# Altium PCB CutMonitor.PcbDoc
Units mm, origin at the board's own origin, x right, y up, seen from the top; angles counter-clockwise.
Board outline 50 x 50 mm, 4 copper layers (Top Signal Layer, Power Layer, Ground Layer, Bottom Signal Layer), stack 1.989 mm thick; 166 components, 43 nets, 470 pads, 0 vias.
Unrouted connection lines stored in the file: 209.
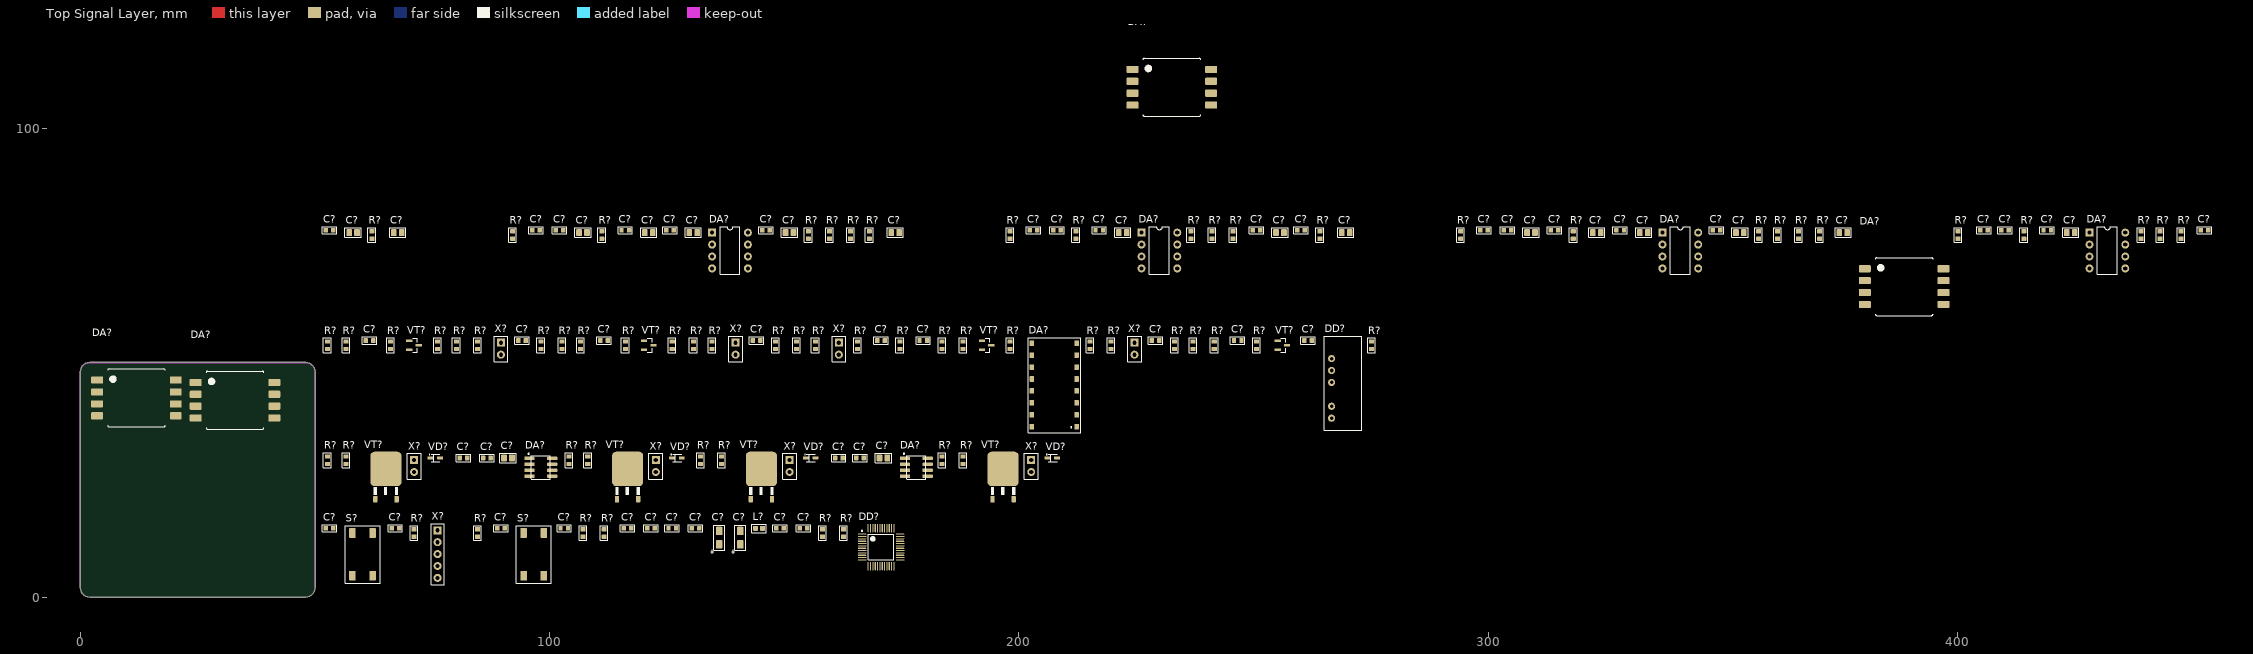
[diagram p0: Top Signal Layer view]
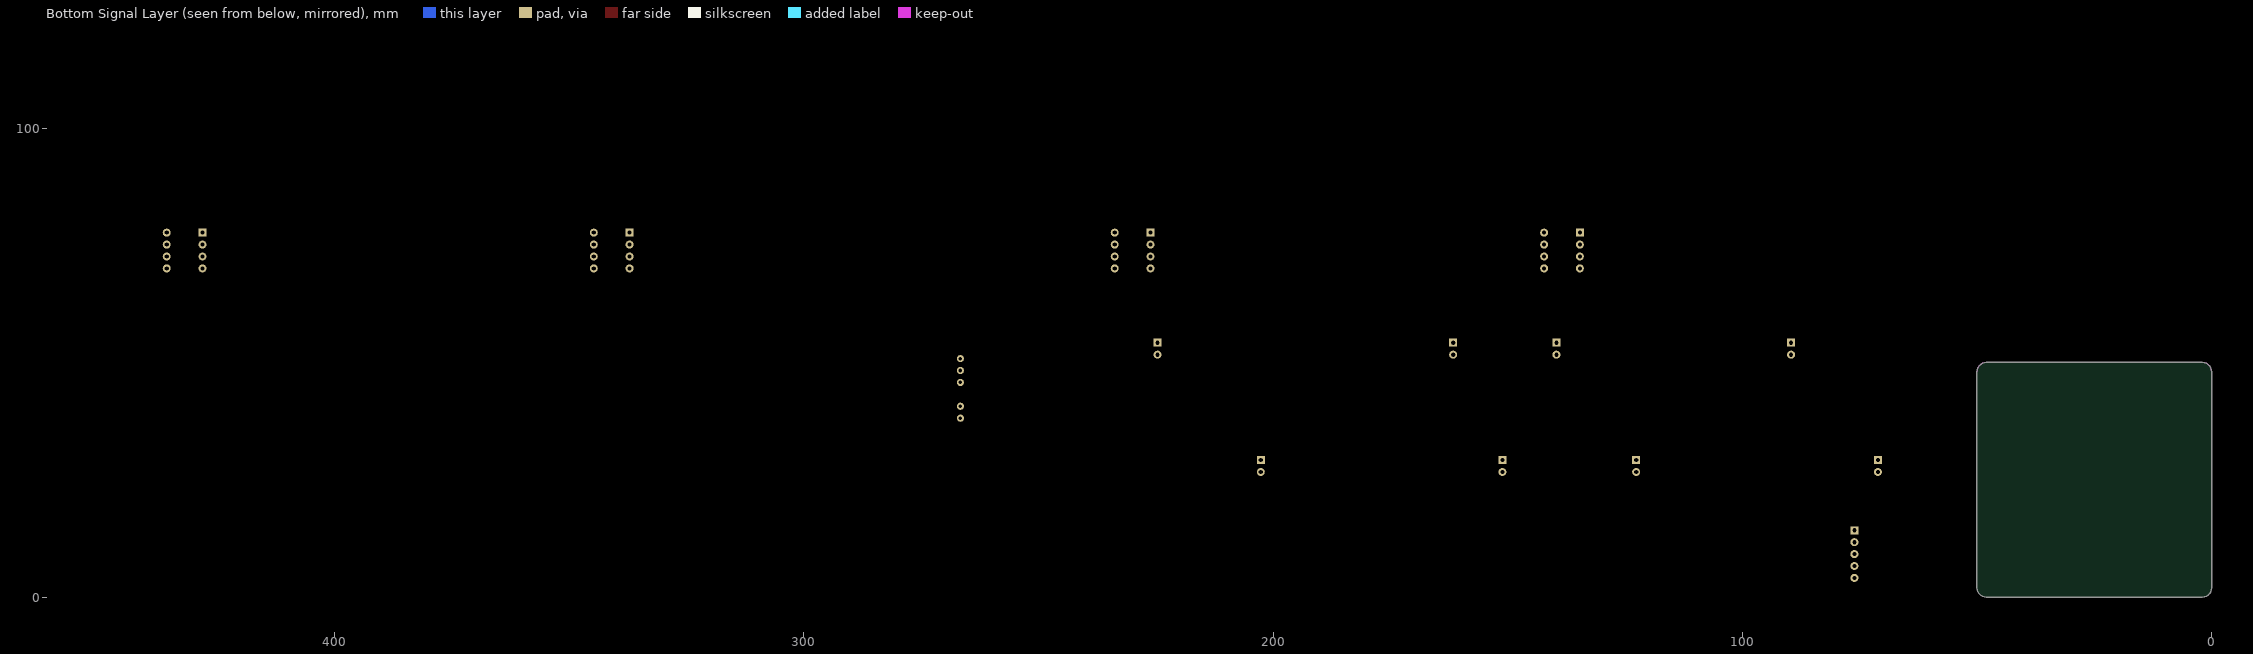
[diagram p1: Bottom Signal Layer view, seen from below]

## Layer stack, top to bottom
Top Solder: solder mask 0.0102, Solder Resist, Dk 3.5
Top Signal Layer: signal copper 0.018
Dielectric 1: core 1.5, Dk 4.2
Power Layer: signal copper 0.036
Dielectric 3: prepreg 0.127, Dk 4.2
Ground Layer: signal copper 0.036
Dielectric 2: core 0.254, Dk 4.2
Bottom Signal Layer: signal copper 0.018
Bottom Solder: solder mask 0.0102, Solder Resist, Dk 3.5

## Board outline
0.486,0.803 0.248,1.182 0.1,1.605 0.05,2.05 0.05,48.05 0.1,48.495 0.248,48.918 0.486,49.297 0.803,49.614 1.182,49.852 1.605,50 2.05,50.05 48.05,50.05 48.495,50 48.918,49.852 49.297,49.614 49.614,49.297 49.852,48.918 50,48.495 50.05,48.05 50.05,2.05 50,1.605 49.852,1.182 49.614,0.803 49.297,0.486 48.918,0.248 48.495,0.1 48.05,0.05 2.05,0.05 1.605,0.1 1.182,0.248 0.803,0.486

## Design rules (kind name [scope] priority, off if disabled: settings)
Clearance Clearance_tracks_inner [OnLayer('Power Layer') OR OnLayer('Ground Layer')] p1: gap=0.35 ignorepadtopadclearanceinfootprint=FALSE except(0: Arc-Hole Track-Hole SMDPad-Hole THPad-Hole Via-Hole Fill-Hole Poly-Hole Region-Hole Text-Hole) // Зазоры между проводниками на внутренних слоях
Clearance Clearance_InputPower [All vs InNet('EGND')] p2: gap=0.3 ignorepadtopadclearanceinfootprint=FALSE
Clearance Clearance_InputChulck [InNet('NetC2_1') vs InNet('NetC2_2')] p3: gap=0.3 ignorepadtopadclearanceinfootprint=FALSE
Clearance Clearance_OutputChulck [InNet('12B') vs InNet('NetC4_2')] p4: gap=0.3 ignorepadtopadclearanceinfootprint=FALSE
Clearance [All] p5: gap=0.2 ignorepadtopadclearanceinfootprint=FALSE
ComponentClearance [All] p1: gap=0.001 collisioncheckmode=3 verticalgap=0 showdistances=FALSE
Height [All] p1: minheight=0 maxheight=100 prefheight=12.7
HoleSize [All] p1: absolutevalues=TRUE maxlimit=10 minlimit=0.2 maxpercent=80.000 minpercent=20.000
MinimumAnnularRing AnnularRing_via [IsVia] p1: minimumring=0.1
MinimumSolderMaskSliver [All] p1: minsoldermaskwidth=0.1
PolygonConnect PolygonConnect_Via [IsVia] p1: connectstyle=Direct reliefconductorwidth=0.254 reliefentries=4 polygonreliefangle="90 Angle" airgapwidth=0.2
PolygonConnect PolygonConnect_EGND [InNet('EGND')] p2: connectstyle=Direct reliefconductorwidth=0.254 reliefentries=4 polygonreliefangle="90 Angle" airgapwidth=0.2
PolygonConnect [All] p3: connectstyle=Relief reliefconductorwidth=0.6 reliefentries=4 polygonreliefangle="90 Angle" airgapwidth=0.2
RoutingVias [All] p1: holewidth=0.711 width=1.27 viastyle="Through Hole" minholewidth=0.711 minwidth=1.27 maxholewidth=0.711 maxwidth=1.27
ShortCircuit ShortCircuit_ANALOG [InNet('3,3В') vs InNet('3,3ВA')] p1: allowed=TRUE
ShortCircuit [All] p2: allowed=FALSE
SilkToSilkClearance [All] p1: silktosilkclearance=0
SilkToSolderMaskClearance [IsPad] p1: minsilkscreentomaskgap=0 clearancetoexposedcopper=TRUE
SolderMaskExpansion [All] p1: expansion=0.025
Width [All] p1: maxlimit=4 minlimit=0.1 preferedwidth=0.2
Width 3,3В [InNet('3,3В')] p2: maxlimit=2 minlimit=0.2 preferedwidth=1
Width 24В [InNet('24В')] p3: maxlimit=4 minlimit=0.2 preferedwidth=4
Width 5В [InNet('5В')] p4: maxlimit=3 minlimit=0.2 preferedwidth=3
23 further rules are at their usual default settings.

## Classes and differential pairs
component class CutMonitor_PressureSensor: C? DA? R?
component class CutMonitor_Opto: C? DA? DD? R? VT? X?
component class CutMonitor_Motor: C? DA? R? VD? VT? X?
component class CutMonitor_MCU: C? DD? L? R? S? VD? X?

## Components (designator, comment, footprint, x,y, rotation, side; value= is the part's Value field where it differs from the comment)
C? "Capacitor" C0603 154.167,14.714 r0 top value=0,1мк
C? "Capacitor" C0603 67.167,14.714 r0 top value=0,1мк
C? "Capacitor_pol" "TANTAL CASE A" 140.667,12.714 r90 top value=10мк
C? "Capacitor_pol" "TANTAL CASE A" 136.167,12.714 r90 top value=10мк
C? "Capacitor" C0603 89.667,14.714 r0 top value=0,1мк
C? "Capacitor" C0603 116.667,14.714 r0 top value=0,1мк
C? "Capacitor" C0603 121.667,14.714 r0 top value=0,1мк
C? "Capacitor" C0603 126.167,14.714 r0 top value=0,1мк
C? "Capacitor" C0603 103.167,14.714 r0 top value=0,1мк
C? "Capacitor" C0603 131.167,14.714 r0 top value=0,1мк
C? "Capacitor" C0603 53.167,14.714 r0 top value=0,1мк
C? "Capacitor" C0603 149.167,14.714 r0 top value=0,1мк
C? "Capacitor" C0603 166.167,29.714 r0 top value=0,1мк
C? "Capacitor" C0603 81.667,29.714 r0 top value=0,1мк
C? "Capacitor" C0805 91.167,29.714 r0 top value=1мк
C? "Capacitor" C0805 171.166,29.714 r0 top value=1мк
C? "Capacitor" C0603 86.667,29.714 r0 top value=0,1мк
C? "Capacitor" C0603 161.667,29.714 r0 top value=0,1мк
C? "Capacitor" C0603 144.167,54.714 r0 top value=0,1мк
C? "Capacitor" C0603 261.666,54.714 r0 top value=0,1мк
C? "Capacitor" C0603 111.667,54.714 r0 top value=0,1мк
C? "Capacitor" C0603 229.166,54.714 r0 top value=0,1мк
C? "Capacitor" C0603 246.666,54.714 r0 top value=0,1мк
C? "Capacitor" C0603 94.167,54.714 r0 top value=0,1мк
C? "Capacitor" C0603 179.666,54.714 r0 top value=0,1мк
C? "Capacitor" C0603 170.666,54.714 r0 top value=0,1мк
C? "Capacitor" C0603 61.667,54.714 r0 top value=0,1мк
C? "Capacitor" C0603 125.667,78.214 r0 top value=0,1мк
C? "Capacitor" C0603 260.166,78.214 r0 top value=10
C? "Capacitor" C0805 58.167,77.714 r0 top value=1мк
C? "Capacitor" C0603 217.166,78.214 r0 top value=0,1мк
C? "Capacitor" C0805 173.666,77.714 r0 top value=1мк
C? "Capacitor" C0805 130.667,77.714 r0 top value=1мк
C? "Capacitor" C0603 203.166,78.214 r0 top value=0,1мк
C? "Capacitor" C0603 53.167,78.214 r0 top value=0,1мк
C? "Capacitor" C0805 222.166,77.714 r0 top value=1мк
C? "Capacitor" C0805 151.167,77.714 r0 top value=1мк
C? "Capacitor" C0603 146.167,78.214 r0 top value=0,1мк
C? "Capacitor" C0805 67.667,77.714 r0 top value=1мк
C? "Capacitor" C0603 116.167,78.214 r0 top value=0,1мк
C? "Capacitor" C0603 102.167,78.214 r0 top value=0,1мк
C? "Capacitor" C0603 97.167,78.214 r0 top value=0,1мк
C? "Capacitor" C0805 121.167,77.714 r0 top value=1мк
C? "Capacitor" C0603 208.166,78.214 r0 top value=10
C? "Capacitor" C0805 107.167,77.714 r0 top value=1мк
C? "Capacitor" C0805 255.666,77.714 r0 top value=1мк
C? "Capacitor" C0603 348.666,78.214 r0 top value=0,1мк
C? "Capacitor" C0603 304.166,78.214 r0 top value=0,1мк
C? "Capacitor" C0805 333.166,77.714 r0 top value=1мк
C? "Capacitor" C0805 353.666,77.714 r0 top value=1мк
C? "Capacitor" C0603 250.666,78.214 r0 top value=0,1мк
C? "Capacitor" C0805 309.166,77.714 r0 top value=1мк
C? "Capacitor" C0603 328.166,78.214 r0 top value=0,1мк
C? "Capacitor" C0603 410.166,78.214 r0 top value=10
C? "Capacitor" C0603 299.166,78.214 r0 top value=0,1мк
C? "Capacitor" C0603 314.166,78.214 r0 top value=0,1мк
C? "Capacitor" C0603 419.166,78.214 r0 top value=0,1мк
C? "Capacitor" C0603 452.666,78.214 r0 top value=10
C? "Capacitor" C0603 405.666,78.214 r0 top value=0,1мк
C? "Capacitor" C0805 323.166,77.714 r0 top value=1мк
C? "Capacitor" C0805 269.666,77.714 r0 top value=1мк
C? "Capacitor" C0805 424.166,77.714 r0 top value=1мк
C? "Capacitor" C0805 375.666,77.714 r0 top value=1мк
DA? "LM5110" SO8 98.167,27.714 r0 top
DA? "LM5110" SO8 178.166,27.714 r0 top
DA? "OPTO-4" OPTO-16 211.666,35.714 r90 top
DA? "OPA137PA" DIP8 428.166,77.714 r0 top
DA? "MPXV5050GP" SOP8 33,42 r0 top
DA? "MPXV5050GP" SOP8 388.666,66.214 r0 top
DA? "OPA137PA" DIP8 226.166,77.714 r0 top
DA? "OPA137PA" DIP8 337.166,77.714 r0 top
DA? "MPXV5050GP" SOP8 232.618,108.69 r0 top
DA? "MPXV5050GP" SOP8 12,42.5 r0 top
DA? "OPA137PA" DIP8 134.667,77.714 r0 top
DD? "STM32F103C8T6TR" LQFP48 170.666,10.714 r0 top
DD? "TMA" TMH0505 266.666,40.714 r90 top
L? "Inductor" L0603 144.667,14.714 r0 top
R? "Resistor_0,062Вт" R0603 84.667,13.714 r90 top value=10к
R? "Resistor_0,062Вт" R0603 71.167,13.714 r90 top value=100
R? "Resistor_0,062Вт" R0603 111.667,13.714 r90 top value=10к
R? "Resistor_0,062Вт" R0603 107.167,13.714 r90 top value=100
R? "Resistor_0,062Вт" R0603 162.667,13.714 r90 top value=10к
R? "Resistor_0,062Вт" R0603 158.167,13.714 r90 top value=10к
R? "Resistor_0,062Вт" R0603 183.666,29.214 r90 top value=10к
R? "Resistor_0,062Вт" R0603 188.166,29.214 r90 top value=100
R? "Resistor_0,062Вт" R0603 52.667,29.214 r90 top value=10к
R? "Resistor_0,062Вт" R0603 56.667,29.214 r90 top value=100
R? "Resistor_0,062Вт" R0603 132.167,29.214 r90 top value=10к
R? "Resistor_0,062Вт" R0603 136.667,29.214 r90 top value=100
R? "Resistor_0,062Вт" R0603 104.167,29.214 r90 top value=10к
R? "Resistor_0,062Вт" R0603 108.167,29.214 r90 top value=100
R? "Resistor_0,062Вт" R0603 66.167,53.714 r90 top value=100
R? "Resistor_0,062Вт" R0603 116.167,53.714 r90 top value=100
R? "Resistor_0,062Вт" R0603 188.166,53.714 r90 top value=100
R? "Resistor_0,062Вт" R0603 250.666,53.714 r90 top value=100
R? "Resistor_0,062Вт" R0603 76.167,53.714 r90 top value=10к
R? "Resistor_0,062Вт" R0603 52.667,53.714 r90 top value=1к
R? "Resistor_0,062Вт" R0603 56.667,53.714 r90 top value=1к
R? "Resistor_0,062Вт" R0603 134.667,53.714 r90 top value=10к
R? "Resistor_0,062Вт" R0603 98.167,53.714 r90 top value=1к
R? "Resistor_0,062Вт" R0603 102.667,53.714 r90 top value=1к
R? "Resistor_0,062Вт" R0603 219.666,53.714 r90 top value=10к
R? "Resistor_0,062Вт" R0603 165.667,53.714 r90 top value=1к
R? "Resistor_0,062Вт" R0603 174.666,53.714 r90 top value=1к
R? "Resistor_0,062Вт" R0603 275.166,53.714 r90 top value=10к
R? "Resistor_0,062Вт" R0603 237.166,53.714 r90 top value=1к
R? "Resistor_0,062Вт" R0603 241.666,53.714 r90 top value=1к
R? "Resistor_0,062Вт" R0603 80.167,53.714 r90 top value=100
R? "Resistor_0,062Вт" R0603 84.667,53.714 r90 top value=150
R? "Resistor_0,062Вт" R0603 126.167,53.714 r90 top value=100
R? "Resistor_0,062Вт" R0603 130.667,53.714 r90 top value=150
R? "Resistor_0,062Вт" R0603 152.667,53.714 r90 top value=100
R? "Resistor_0,062Вт" R0603 156.667,53.714 r90 top value=150
R? "Resistor_0,062Вт" R0603 198.166,53.714 r90 top value=100
R? "Resistor_0,062Вт" R0603 215.166,53.714 r90 top value=150
R? "Resistor_0,062Вт" R0603 106.667,53.714 r90 top value=150
R? "Resistor_0,062Вт" R0603 148.167,53.714 r90 top value=150
R? "Resistor_0,062Вт" R0603 183.666,53.714 r90 top value=150
R? "Resistor_0,062Вт" R0603 233.166,53.714 r90 top value=150
R? "Resistor_0,062Вт" R0603 236.666,77.214 r90 top value=1к
R? "Resistor_0,062Вт" R0603 241.166,77.214 r90 top value=1к
R? "Resistor_0,062Вт" R0603 212.166,77.214 r90 top value=1к
R? "Resistor_0,062Вт" R0603 168.166,77.214 r90 top value=1к
R? "Resistor_0,062Вт" R0603 370.666,77.214 r90 top value=1к
R? "Resistor_0,062Вт" R0603 294.166,77.214 r90 top value=1м
R? "Resistor_0,062Вт" R0603 357.666,77.214 r90 top value=1к
R? "Resistor_0,062Вт" R0603 443.166,77.214 r90 top value=1к
R? "Resistor_0,062Вт" R0603 447.666,77.214 r90 top value=1к
R? "Resistor_0,062Вт" R0603 264.166,77.214 r90 top value=1к
R? "Resistor_0,062Вт" R0603 366.166,77.214 r90 top value=1к
R? "Resistor_0,062Вт" R0603 361.666,77.214 r90 top value=1к
R? "Resistor_0,062Вт" R0603 318.166,77.214 r90 top value=1к
R? "Resistor_0,062Вт" R0603 400.166,77.214 r90 top value=1м
R? "Resistor_0,062Вт" R0603 439.166,77.214 r90 top value=1к
R? "Resistor_0,062Вт" R0603 414.166,77.214 r90 top value=1к
R? "Resistor_0,062Вт" R0603 92.167,77.214 r90 top value=1м
R? "Resistor_0,062Вт" R0603 164.167,77.214 r90 top value=1к
R? "Resistor_0,062Вт" R0603 155.167,77.214 r90 top value=1к
R? "Resistor_0,062Вт" R0603 159.667,77.214 r90 top value=1к
R? "Resistor_0,062Вт" R0603 111.167,77.214 r90 top value=1к
R? "Resistor_0,062Вт" R0603 62.167,77.214 r90 top value=1к
R? "Resistor_0,062Вт" R0603 198.166,77.214 r90 top value=1м
R? "Resistor_0,062Вт" R0603 245.666,77.214 r90 top value=1к
S? "Button" Button_SMD 60.167,9.214 r90 top
S? "Button" Button_SMD 96.667,9.214 r90 top
VD? "DiodeSchottky" SOD-323 207.166,29.714 r0 top
VD? "DiodeSchottky" SOD-323 75.667,29.714 r0 top
VD? "DiodeSchottky" SOD-323 155.667,29.714 r0 top
VD? "DiodeSchottky" SOD-323 127.167,29.714 r0 top
VT? "N-MOSFET" DPAK 196.666,27.214 r0 top
VT? "N-MOSFET" DPAK 65.167,27.214 r0 top
VT? "N-MOSFET" DPAK 145.167,27.214 r0 top
VT? "N-MOSFET" DPAK 116.667,27.214 r0 top
VT? "P-MOSFET" SOT23-3 71.167,53.714 r0 top
VT? "P-MOSFET" SOT23-3 121.167,53.714 r0 top
VT? "P-MOSFET" SOT23-3 193.166,53.714 r0 top
VT? "P-MOSFET" SOT23-3 256.166,53.714 r0 top
X? "SWD Программатор" PLS-5 76.167,9.214 r0 top
X? "=Name" JUMPER_2.54 202.666,26.714 r0 top
X? "=Name" JUMPER_2.54 71.167,26.714 r0 top
X? "=Name" JUMPER_2.54 151.167,26.714 r0 top
X? "=Name" JUMPER_2.54 122.667,26.714 r0 top
X? "=Name" JUMPER_2.54 89.667,51.714 r0 top
X? "=Name" JUMPER_2.54 139.667,51.714 r0 top
X? "=Name" JUMPER_2.54 161.667,51.714 r0 top
X? "=Name" JUMPER_2.54 224.666,51.714 r0 top

## Footprints (in the part's own frame and the unit in brackets; to place one, negate y for a bottom-side part, rotate by r counter-clockwise, add the part's x,y. Pads: shape width x height; smd on the part's side, far side on the other; paste and mask are expansions set on the pad)
Button_SMD [mm] "Кнопка"
  rrect25% 2.1x1.4 smd: 1(-4.6,2.15) 2(4.5,2.15) 3(-4.6,-2.15) 4(4.5,-2.15)
  silkscreen extent -6.22,-3.75 6,3.7, body extent -4.5,-3 4.5,3, height 7
C0603 [mm]
  rrect25% 0.94x1.03 smd: 1(-0.8,0) 2(0.8,0)
  silkscreen extent -1.55,-0.77 1.53,0.77, body extent -0.8,-0.4 0.8,0.4, height 0.9
C0805 [mm]
  rrect25% 1.21x1.46 smd paste-5: 1(-0.845,0) 2(0.845,0)
  silkscreen extent -1.73,-1 1.73,1, body extent -1,-0.62 1,0.63, height 0.78
DIP8 [mm]
  rect 1.7x1.7 hole 0.9: 1(0,0)
  round 1.7 hole 0.9: 2(0,-2.54) 3(0,-5.08) 4(0,-7.62) 5(7.62,-7.62) 6(7.62,-5.08) 7(7.62,-2.54) 8(7.62,0)
  silkscreen extent 1.68,-8.89 5.94,1.27, body extent -0.12,-8.51 7.75,0.89, height 4.36
DPAK [mil]
  rrect25% 37x52 smd: 1(-89,-248) 3(89,-248)
  rrect25% 260x288 smd: 2(0,6)
  silkscreen extent -102,-213 102,-146, body extent -193,-266 128,108, height 91
JUMPER_2.54 [mm] "Разъем для программатора ISP"
  rect 1.7x1.7 hole 0.9: 1(0,2.54)
  round 1.7 hole 0.9: 2(0,0)
  silkscreen extent -1.45,-1.54 1.5,3.95, body extent -1.26,-1.35 1.28,3.79, height 8.54
L0603 [mm]
  rrect25% 1.05x1.07 smd paste-5: 1(-0.76,0) 2(0.76,0)
  silkscreen extent -1.53,-0.9 1.53,0.9, body extent -0.8,-0.4 0.8,0.4, height 0.8
LQFP48 [mm] "Thin QFP, 48-Leads, Body 7x7mm, Pitch 0.5mm, IPC Medium Density"
  oval 1.8x0.25 smd: 1(-4.05,2.75) 2(-4.05,2.25) 3(-4.05,1.75) 4(-4.05,1.25) 5(-4.05,0.75) 6(-4.05,0.25) 7(-4.05,-0.25) 8(-4.05,-0.75) 9(-4.05,-1.25) 10(-4.05,-1.75) 11(-4.05,-2.25) 12(-4.05,-2.75) 25(4.05,-2.75) 26(4.05,-2.25) 27(4.05,-1.75) 28(4.05,-1.25) 29(4.05,-0.75) 30(4.05,-0.25) 31(4.05,0.25) 32(4.05,0.75) 33(4.05,1.25) 34(4.05,1.75) 35(4.05,2.25) 36(4.05,2.75)
  oval 0.25x1.8 smd: 13(-2.75,-4.05) 14(-2.25,-4.05) 15(-1.75,-4.05) 16(-1.25,-4.05) 17(-0.75,-4.05) 18(-0.25,-4.05) 19(0.25,-4.05) 20(0.75,-4.05) 21(1.25,-4.05) 22(1.75,-4.05) 23(2.25,-4.05) 24(2.75,-4.05) 37(2.75,4.05) 38(2.25,4.05) 39(1.75,4.05) 40(1.25,4.05) 41(0.75,4.05) 42(0.25,4.05) 43(-0.25,4.05) 44(-0.75,4.05) 45(-1.25,4.05) 46(-1.75,4.05) 47(-2.25,4.05) 48(-2.75,4.05)
  silkscreen extent -4.17,-2.75 2.75,3.57, body extent -4.51,-4.51 4.51,4.51, height 1.46
OPTO-16 [mm]
  rrect25% 1.2x0.96 smd: 1(0.651,-0.658) 2(3.191,-0.658) 3(5.731,-0.658) 4(8.271,-0.658) 5(10.811,-0.658) 6(13.351,-0.658) 7(15.891,-0.658) 8(18.431,-0.658) 9(18.431,8.862) 10(15.891,8.862) 11(13.351,8.862) 12(10.811,8.862) 13(8.271,8.862) 14(5.731,8.862) 15(3.191,8.862) 16(0.651,8.862)
  silkscreen extent -0.65,-1.5 19.63,9.67, body extent -0.36,-0.91 19.46,9.09, height 3.85
PLS-5 [mm]
  rect 1.7x1.7 hole 0.9: 1(0,5.08)
  round 1.7 hole 0.9: 2(0,2.54) 3(0,0)
  round 1.7 hole 0.9 mask+0.102: 4(0,-2.54) 5(0,-5.08)
  silkscreen extent -1.4,-6.48 1.4,6.46, body extent -1.27,-6.35 1.27,6.35, height 8.54
R0603 [mm]
  rrect25% 0.92x1.08 smd: 1(-0.8,0) 2(0.8,0)
  silkscreen extent -1.55,-0.8 1.55,0.82, body extent -0.8,-0.4 0.8,0.4, height 0.5
SO8 [mm]
  rrect25% 2.17x0.68 smd: 1(-2.43,1.905) 2(-2.43,0.635) 3(-2.43,-0.635) 4(-2.43,-1.905) 5(2.43,-1.905) 6(2.43,-0.635) 7(2.43,0.635) 8(2.43,1.905)
  silkscreen extent -2.74,-2.5 2,3.02, body extent -3,-2.54 3,2.54, height 1.7
SOD-323 [mm]
  rrect25% 1.26x0.58 smd: 1(-1.03,0) 2(1.03,0)
  silkscreen extent -1.26,-0.82 1,0.82, body extent -1.3,-0.67 1.3,0.68, height 1.1
SOP8 [mil]
  rrect25% 100x60 smd: 1(-330,150) 2(-330,50) 3(-330,-50) 4(-330,-150) 5(330,-150) 6(330,-50) 7(330,50) 8(330,150)
  silkscreen extent -242,-242 242,242, body extent -358,-237 358,488, height 308
SOT23-3 [mm]
  rrect25% 1.35x0.61 smd: 1(-1,0.95) 2(1,0) 3(-1,-0.95)
  silkscreen extent -0.3,-1.52 0.7,1.52, body extent -1.15,-1.5 1.15,1.5, height 1.1
"TANTAL CASE A" [mm]
  rrect25% 1.81x1.36 smd: 1(-1.425,0) 2(1.425,0)
  silkscreen extent -3.37,-1.2 2.7,1.82, body extent -1.7,-0.9 1.7,0.9, height 1.8
TMH0505 [mil]
  round 60 hole 30: 1(-100,0) 2(0,0) 4(200,0) 6(400,0) ""(300,0)
  silkscreen extent -201,-254 587,63, body extent -190,-245 578,54, height 404

## Part data
C? C? C? C? C? C? C? C? C? C? C? C? C? C? C? C? C? C? C? C? C? C? C? C? C? C? C? C? C? C? C? C? C? C? C? C? C? C? C?: library part cap131, "Конденсатор", Manufacture=Murata, Part Name=Ceramic, Part Number=GRM188R71H104KA93D, Voltage=50B, id=cap131, TKE=X7R
C? C?: library part cap199, "Конденсатор полярный", Manufacture=Vishay, Part Name=Tantal, Part Number=293D106X9016A2TE3, Voltage=16В, id=cap199
C? C? C? C? C? C? C? C? C? C? C? C? C? C? C? C? C? C?: library part cap151, "Конденсатор", Manufacture=Murata, Part Name=Ceramic, Part Number=GRM21BR71H105K, Voltage=50B, id=cap151, TKE=X7R
C? C? C? C?: library part cap71, "Конденсатор", Manufacture=Murata, Part Name=Ceramic, Part Number=GRM1885C1H100J, Voltage=50B, id=cap71, TKE=NP0
DA? DA?: library part driver15, "Driver 5A 2-OUT Low Side Inv/Non-Inv", Manufacture="Texas Instruments", Maximum output current=5A, Max Operating Supply Voltage=15B, Min Operating Supply Voltage=(-)0,3B, Operating Supply Voltage=3,5-14B, Part Name="Dual 5-A Compound Gate Driver", Part Number=LM5110-1M, id=driver15, Logic High=2,2В, Logic Low=0,8B, “A” OUTPUT=Noninverting, “B” OUTPUT=Noninverting
DA?: library part KB847-B, "Опторазвязка х4", Cut-off frequency=80kHz, Forward Voltage=1,2B, Manufacturer=Kingbright, id=opto1, Part Number=KB847-B
DA? DA? DA? DA?: library part amp11, "FET-INPUT OPERATIONAL AMPLIFIERS", Input Bias Current=100pA, Manufacture="Texas Instruments", Offset voltage=2,5mB, Part Name="FET-INPUT Amplifier", Supply Voltage=4,5-36B, Bandwidth=1МГц, Channels=1, CMRR=76-84dB, id=amp11, Part Number=OPA137PA, PSRR=80,92dB, Rail-to-rail=yes
DA? DA? DA? DA?: "Integrated Silicon Pressure Sensor", Manufacture="Freescale Semiconductor", id=sensor4, Interface=ANALOG, Part Name="Integrated Silicon Pressure Sensor", Part Number=MPXV5050GP, Type sensor=Pressure
DD?: library part microcont0, "Medium-density performance line ARM®-based 32-bit MCU with 64  or 128 KB Flash, USB, CAN, 7 timers, 2 ADCs, 9 com. interfaces", Frequency=72MHz, Part Name=Microcontroller, Power Supply="2.0-3.6 V", ADC=10x12b, Flash=64kb, id=microcont0, Interface="can, i2c, irda, lin, spi, uart, usb", Part Number=STM32F103C8T6TR, Pin in=37
DD?: library part pwr22, "DC/DC преобразователь", Current=200mA, Input Voltage=5B, Manufacturer="Traco Power", Part Name="DC/DC Converter Isolated", Part Number="TMA 0505S", id=pwr22, Output Voltage=5B, Type=Isolated
L?: library part ind0, "EMI Suppression Filter", Part Name="EMI Suppression Filters", Part Number=BLM18PG181SN1D, Rated Current=1,5A, Resistance=0,09Ohm, id=ind0
R? R? R? R? R? R? R? R? R? R? R? R?: library part res483, "Резистор", Manufacture=Yageo, Part Name=Resistor, Part Number=RC0603FR-0710KL, Power=0,062Вт, Accuracy=0,01, id=res483
R? R? R? R? R? R? R? R? R? R? R? R? R? R?: library part res435, "Резистор", Manufacture=Yageo, Part Name=Resistor, Part Number=RC0603FR-07100RL, Power=0,062Вт, Accuracy=0,01, id=res435
R? R? R? R? R? R? R? R? R? R? R? R? R? R? R? R? R? R? R? R? R? R? R? R? R? R? R? R?: library part res459, "Резистор", Manufacture=Yageo, Part Name=Resistor, Part Number=RC0603FR-071KL, Power=0,062Вт, Accuracy=0,01, id=res459
R? R? R? R? R? R? R? R?: library part res439, "Резистор", Manufacture=Yageo, Part Name=Resistor, Part Number=RC0603FR-07150RL, Power=0,062Вт, Accuracy=0,01, id=res439
R? R? R? R?: library part res531, "Резистор", Manufacture=Yageo, Part Name=Resistor, Part Number=RC0603FR-071ML, Power=0,062Вт, Accuracy=0,01, id=res531
S? S?: library part btn4, "Кнопка", Part Name="Button 5mm", id=btn4
VD? VD? VD? VD?: library part diode19, "Диод Шоттки", Capacitance=50pF, Forward Current=10mA, Forward Voltage=0,64B, Manufacture="NXP Semiconductor", Max Reverse Voltage=40B, Part Name="Diode Schottky", Part Number=PMEG4010BEA.115, id=diode19, Number of Channels=1
VT? VT? VT? VT?: library part trans9, Continuous drain current=60A, Gate-to-source voltage=(+-)16B, Manufacturer="International Rectifier", Part Number=IRLR2905ZPBF, Power dissipation=110W, Pulsed drain current=240A, id=trans9, Rds=0,0135Ohm, Structure=n-channel, V drain-source max=55B
VT? VT? VT? VT?: library part trans5, "N-MOSFET", Continuous drain current=(-4,3)A, Gate-to-source voltage=(+-)12B, Manufacturer="International Rectifier", Part Number=IRLML2244TRPbF, Power dissipation=1,3W, Pulsed drain current=(-18)A, id=trans5, Rds=0,054Ohm, Structure=p-channel, V drain-source max=(-20B)
X?: library part connect6, "Разъем - 5 конт. вилка", Manufacture="Ningbo connfly electronic", Part Name=PLS-5, Part Number=DS1021-1*5SF112-B, Contact_1=+3,3B, Contact_2=SWCLK, Contact_3=GND, Contact_4=SWDIO, Contact_5=RESET, Etch=2,54mm, id=connect6
X? X? X? X? X? X? X? X?: library part connect54, "Разъем - 2 конт. вилка", Part Name="Jumper 2,54mm", Etch=2,54mm, id=connect54
  X?: Contact_1=MOTOR1_P, Contact_2=MOTOR1_N
  X?: Contact_1=MOTOR4_P, Contact_2=MOTOR4_N
  X?: Contact_1=MOTOR2_P, Contact_2=MOTOR2_N
  X?: Contact_1=MOTOR3_P, Contact_2=MOTOR3_N
  X?: Contact_1=NET_IN4, Contact_2=NET_OUT4
  X?: Contact_1=NET_IN3, Contact_2=NET_OUT3
  X?: Contact_1=NET_IN2, Contact_2=NET_OUT2
  X?: Contact_1=NET_IN1, Contact_2=NET_OUT1

## Nets (pads, with @x,y where several pads share a name; then routed paths per layer and width w, separated by ;. In a path a pad name is that pad's centre, name@x,y a point inside that pad or via, vN(x,y) a via of type N, cw(c..) or ccw(c..) an arc to the next point about the centre after c; other vN are vias at no path point)
3,3B: C?.1@136.167,11.289 C?.2@53.967,14.714 C?.2@90.467,14.714 C?.2@117.467,14.714 C?.2@122.467,14.714 C?.2@126.967,14.714 C?.2@154.967,14.714 DD?.5 DD?.24 DD?.36 DD?.48 L?.1 R?.1@162.667,12.914 R?.2@84.667,14.514 R?.2@111.667,14.514
3,3В: DA?.10 DA?.12 DA?.14 DA?.16 R?.2@76.167,54.514 R?.2@134.667,54.514 R?.2@219.666,54.514 R?.2@275.166,54.514 VT?.3@70.167,52.764 VT?.3@120.167,52.764 VT?.3@192.166,52.764 VT?.3@255.166,52.764
5BA: C?.2@53.967,78.214 C?.2@59.012,77.714 C?.2@102.967,78.214 C?.2@108.012,77.714 C?.2@126.467,78.214 C?.2@131.512,77.714 C?.2@146.967,78.214 C?.2@152.012,77.714 C?.2@251.466,78.214 C?.2@256.511,77.714 C?.2@304.966,78.214 C?.2@310.011,77.714 C?.2@314.966,78.214 C?.2@324.011,77.714 C?.2@349.466,78.214 C?.2@354.511,77.714 DA?.2@3.618,43.77 DA?.2@24.618,43.27 DA?.2@224.236,109.96 DA?.2@380.284,67.484 DA?.7@142.287,75.174 DA?.7@233.786,75.174 DA?.7@344.786,75.174 DA?.7@435.786,75.174 R?.2@159.667,78.014 R?.2@241.166,78.014 R?.2@366.166,78.014 R?.2@443.166,78.014
5В: C?.2@82.467,29.714 C?.2@87.467,29.714 C?.2@92.012,29.714 C?.2@162.467,29.714 C?.2@166.967,29.714 C?.2@172.011,29.714 DA?.6@100.597,27.079 DA?.6@180.596,27.079 DA?.8@100.597,29.619 DA?.8@180.596,29.619 DD?.1@266.666,38.174
12B: VD?.1@74.637,29.714 VD?.1@126.137,29.714 VD?.1@154.637,29.714 X?.1@71.167,29.254 X?.1@122.667,29.254 X?.1@151.167,29.254 X?.1@202.666,29.254
AGND: C?.1@52.367,78.214 C?.1@57.322,77.714 C?.1@101.367,78.214 C?.1@106.322,77.714 C?.1@124.867,78.214 C?.1@129.822,77.714 C?.1@145.367,78.214 C?.1@150.322,77.714 C?.1@249.866,78.214 C?.1@254.821,77.714 C?.1@303.366,78.214 C?.1@308.321,77.714 C?.1@313.366,78.214 C?.1@322.321,77.714 C?.1@347.866,78.214 C?.1@352.821,77.714 C?.2@97.967,78.214 C?.2@116.967,78.214 C?.2@203.966,78.214 C?.2@217.966,78.214 C?.2@299.966,78.214 C?.2@328.966,78.214 C?.2@406.466,78.214 C?.2@419.966,78.214 DA?.3@3.618,41.23 DA?.3@24.618,40.73 DA?.3@224.236,107.42 DA?.3@380.284,64.944 DA?.4@134.667,70.094 DA?.4@226.166,70.094 DA?.4@337.166,70.094 DA?.4@428.166,70.094 R?.1@155.167,76.414 R?.1@236.666,76.414 R?.1@361.666,76.414 R?.1@439.166,76.414
DGND: C?.1@52.367,14.714 C?.1@60.867,54.714 C?.1@66.367,14.714 C?.1@88.867,14.714 C?.1@102.367,14.714 C?.1@110.867,54.714 C?.1@115.867,14.714 C?.1@120.867,14.714 C?.1@125.367,14.714 C?.1@130.367,14.714 C?.1@148.367,14.714 C?.1@153.367,14.714 C?.1@178.866,54.714 C?.1@245.866,54.714 C?.2@136.167,14.139 C?.2@140.667,14.139 DD?.2@166.616,12.964 DD?.8 DD?.23 DD?.35 DD?.47 R?.1@52.667,52.914 R?.1@56.667,52.914 R?.1@98.167,52.914 R?.1@102.667,52.914 R?.1@158.167,12.914 R?.1@165.667,52.914 R?.1@174.666,52.914 R?.1@237.166,52.914 R?.1@241.666,52.914 S?.4 X?.3
EGND: C?.1@260.866,54.714 DD?.4@266.666,45.794 R?.1@80.167,52.914 R?.1@126.167,52.914 R?.1@152.667,52.914 R?.1@198.166,52.914
GND: C?.1@80.867,29.714 C?.1@85.867,29.714 C?.1@90.322,29.714 C?.1@160.867,29.714 C?.1@165.366,29.714 C?.1@170.321,29.714 DA?.1@95.737,29.619 DA?.1@175.736,29.619 DA?.3@95.737,27.079 DA?.3@175.736,27.079 R?.1@52.667,28.414 R?.1@104.167,28.414 R?.1@132.167,28.414 R?.1@183.666,28.414 VT?.3@67.427,20.914 VT?.3@118.927,20.914 VT?.3@147.427,20.914 VT?.3@198.927,20.914
MCU_BTN_1: DD?.18 R?.2@107.167,14.514
MCU_BTN_2: DD?.19 R?.2@71.167,14.514
MCU_OPTO_OUT1: DD?.41 R?.2@237.166,54.514 VT?.2@257.166,53.714
MCU_OPTO_OUT2: DD?.42 R?.2@165.667,54.514 VT?.2@194.166,53.714
MCU_OPTO_OUT3: DD?.43 R?.2@98.167,54.514 VT?.2@122.167,53.714
MCU_OPTO_OUT4: DD?.45 R?.2@52.667,54.514 VT?.2@72.167,53.714
MCU_RESET: C?.2@149.967,14.714 DD?.1@166.616,13.464 DD?.7 R?.2@162.667,14.514
MCU_SENSOR_1: C?.2@453.466,78.214 DA?.6@435.786,72.634 DD?.21 R?.1@447.666,76.414
MCU_SENSOR_2: C?.2@260.966,78.214 DA?.6@233.786,72.634 DD?.22 R?.1@245.666,76.414
MCU_SENSOR_3: C?.2@410.966,78.214 DA?.6@344.786,72.634 DD?.25 R?.1@370.666,76.414
MCU_SENSOR_4: C?.2@208.966,78.214 DA?.6@142.287,72.634 DD?.26 R?.1@164.167,76.414
MCU_SWCLK: DD?.6@166.616,10.964 DD?.37
MCU_SWDIO: DD?.34
MOTOR_OUT1: DA?.2@175.736,28.349 DD?.11
MOTOR_OUT2: DA?.4@175.736,25.809 DD?.12
MOTOR_OUT3: DA?.2@95.737,28.349 DD?.13
MOTOR_OUT4: DA?.4@95.737,25.809 DD?.14
NetC?_1: C?.1@140.667,11.289 C?.2@131.967,14.714 DD?.9 L?.2
NetC?_2: C?.2@67.967,14.714 R?.1@71.167,12.914 R?.1@84.667,12.914 S?.1@58.017,4.614
NetDA?_4: DA?.4@3.618,38.69 R?.2@62.167,78.014
NetDA?_5: DA?.5@100.597,25.809 R?.2@56.667,30.014
NetDA?_7: DA?.7@100.597,28.349 R?.2@108.167,30.014
NetDA?_9: DA?.9 R?.2@66.167,54.514
NetDA?_11: DA?.11 R?.2@116.167,54.514
NetDA?_13: DA?.13 R?.2@188.166,54.514
NetDA?_15: DA?.15 R?.2@250.666,54.514
NetDD?_3: DD?.3 X?.5
NetDD?_4: DD?.4@166.616,11.964 X?.2@76.167,11.754
NetDD?_44: DD?.44 R?.2@158.167,14.514
NetR?_1: R?.1@188.166,28.414 R?.2@183.666,30.014 VT?.1@194.406,20.914
NetR?_2: R?.2@80.167,54.514 X?.2@89.667,51.714
NetVD?_1: VD?.1@206.136,29.714 X?.1@76.167,14.294
NetVD?_2: VD?.2@208.196,29.714 VT?.2@196.666,27.366 X?.2@202.666,26.714
PGND: DD?.2@266.666,40.714
pads on no net: C?.1@66.822,77.714 C?.1@93.367,54.714 C?.1@96.367,78.214 C?.1@115.367,78.214 C?.1@120.322,77.714 C?.1@143.367,54.714 C?.1@169.866,54.714 C?.1@172.821,77.714 C?.1@202.366,78.214 C?.1@207.366,78.214 C?.1@216.366,78.214 C?.1@221.321,77.714 C?.1@228.366,54.714 C?.1@259.366,78.214 C?.1@268.821,77.714 C?.1@298.366,78.214 C?.1@327.366,78.214 C?.1@332.321,77.714 C?.1@374.821,77.714 C?.1@404.866,78.214 C?.1@409.366,78.214 C?.1@418.366,78.214 C?.1@423.321,77.714 C?.1@451.866,78.214 C?.2@62.467,54.714 C?.2@68.512,77.714 C?.2@94.967,54.714 C?.2@103.967,14.714 C?.2@112.467,54.714 C?.2@122.012,77.714 C?.2@144.967,54.714 C?.2@171.466,54.714 C?.2@174.511,77.714 C?.2@180.466,54.714 C?.2@223.011,77.714 C?.2@229.966,54.714 C?.2@247.466,54.714 C?.2@262.466,54.714 C?.2@270.511,77.714 C?.2@334.011,77.714 C?.2@376.511,77.714 C?.2@425.011,77.714 DA?.1@3.618,46.31 DA?.1@24.618,45.81 DA?.1@134.667,77.714 DA?.1@212.324,36.364 DA?.1@224.236,112.5 DA?.1@226.166,77.714 DA?.1@337.166,77.714 DA?.1@380.284,70.024 DA?.1@428.166,77.714 DA?.2@134.667,75.174 DA?.2@212.324,38.904 DA?.2@226.166,75.174 DA?.2@337.166,75.174 DA?.2@428.166,75.174 DA?.3@134.667,72.634 DA?.3@212.324,41.444 DA?.3@226.166,72.634 DA?.3@337.166,72.634 DA?.3@428.166,72.634 DA?.4@24.618,38.19 DA?.4@212.324,43.984 DA?.4@224.236,104.88 DA?.4@380.284,62.404 DA?.5@20.382,38.69 DA?.5@41.382,38.19 DA?.5@142.287,70.094 DA?.5@180.596,25.809 DA?.5@212.324,46.524 DA?.5@233.786,70.094 DA?.5@241,104.88 DA?.5@344.786,70.094 DA?.5@397.048,62.404 DA?.5@435.786,70.094 DA?.6@20.382,41.23 DA?.6@41.382,40.73 DA?.6@212.324,49.064 DA?.6@241,107.42 DA?.6@397.048,64.944 DA?.7@20.382,43.77 DA?.7@41.382,43.27 DA?.7@180.596,28.349 DA?.7@212.324,51.604 DA?.7@241,109.96 DA?.7@397.048,67.484 DA?.8@20.382,46.31 DA?.8@41.382,45.81 DA?.8@142.287,77.714 DA?.8@212.324,54.144 DA?.8@233.786,77.714 DA?.8@241,112.5 DA?.8@344.786,77.714 DA?.8@397.048,70.024 DA?.8@435.786,77.714 DD?. DD?.6@266.666,50.874 DD?.10 DD?.15 DD?.16 DD?.17 DD?.20 DD?.27 DD?.28 DD?.29 DD?.30 DD?.31 DD?.32 DD?.33 DD?.38 DD?.39 DD?.40 DD?.46 R?.1@56.667,28.414 R?.1@62.167,76.414 R?.1@66.167,52.914 R?.1@76.167,52.914 R?.1@84.667,52.914 R?.1@92.167,76.414 R?.1@106.667,52.914 R?.1@107.167,12.914 R?.1@108.167,28.414 R?.1@111.167,76.414 R?.1@111.667,12.914 R?.1@116.167,52.914 R?.1@130.667,52.914 R?.1@134.667,52.914 R?.1@136.667,28.414 R?.1@148.167,52.914 R?.1@156.667,52.914 R?.1@159.667,76.414 R?.1@168.166,76.414 R?.1@183.666,52.914 R?.1@188.166,52.914 R?.1@198.166,76.414 R?.1@212.166,76.414 R?.1@215.166,52.914 R?.1@219.666,52.914 R?.1@233.166,52.914 R?.1@241.166,76.414 R?.1@250.666,52.914 R?.1@264.166,76.414 R?.1@275.166,52.914 R?.1@294.166,76.414 R?.1@318.166,76.414 R?.1@357.666,76.414 R?.1@366.166,76.414 R?.1@400.166,76.414 R?.1@414.166,76.414 R?.1@443.166,76.414 R?.2@52.667,30.014 R?.2@56.667,54.514 R?.2@84.667,54.514 R?.2@92.167,78.014 R?.2@102.667,54.514 R?.2@104.167,30.014 R?.2@106.667,54.514 R?.2@111.167,78.014 R?.2@126.167,54.514 R?.2@130.667,54.514 R?.2@132.167,30.014 R?.2@136.667,30.014 R?.2@148.167,54.514 R?.2@152.667,54.514 R?.2@155.167,78.014 R?.2@156.667,54.514 R?.2@164.167,78.014 R?.2@168.166,78.014 R?.2@174.666,54.514 R?.2@183.666,54.514 R?.2@188.166,30.014 R?.2@198.166,54.514 R?.2@198.166,78.014 R?.2@212.166,78.014 R?.2@215.166,54.514 R?.2@233.166,54.514 R?.2@236.666,78.014 R?.2@241.666,54.514 R?.2@245.666,78.014 R?.2@264.166,78.014 R?.2@294.166,78.014 R?.2@318.166,78.014 R?.2@357.666,78.014 R?.2@361.666,78.014 R?.2@370.666,78.014 R?.2@400.166,78.014 R?.2@414.166,78.014 R?.2@439.166,78.014 R?.2@447.666,78.014 S?.1@94.517,4.614 S?.2 S?.3 VD?.2@76.697,29.714 VD?.2@128.197,29.714 VD?.2@156.697,29.714 VT?.1@62.906,20.914 VT?.1@70.167,54.664 VT?.1@114.406,20.914 VT?.1@120.167,54.664 VT?.1@142.906,20.914 VT?.1@192.166,54.664 VT?.1@255.166,54.664 VT?.2@65.167,27.366 VT?.2@116.667,27.366 VT?.2@145.167,27.366 X?.1@89.667,54.254 X?.1@139.667,54.254 X?.1@161.667,54.254 X?.1@224.666,54.254 X?.2@71.167,26.714 X?.2@122.667,26.714 X?.2@139.667,51.714 X?.2@151.167,26.714 X?.2@161.667,51.714 X?.2@224.666,51.714 X?.4

## Keep-outs
Keep-Out Layer:
  lines w0.1: 0.05,2.05 0.05,48.05 0.1,48.495 0.248,48.918 0.486,49.297 0.803,49.614 1.182,49.852 1.605,50 48.495,50 48.918,49.852 49.297,49.614 49.614,49.297 49.852,48.918 50,48.495 50.05,48.05 50.05,2.05